# Altium PCB Test.PcbDoc (part 2 of 4)
Units mm, origin at the board's own origin, x right, y up, seen from the top; angles counter-clockwise.
Board outline 152.4 x 101.6 mm, 4 copper layers (Top Layer 1, Top Layer, Bottom Layer, Bottom Layer 1), stack 0.603 mm thick; 308 components, 154 nets, 859 pads, 6474 vias.
Unrouted connection lines stored in the file: 683.
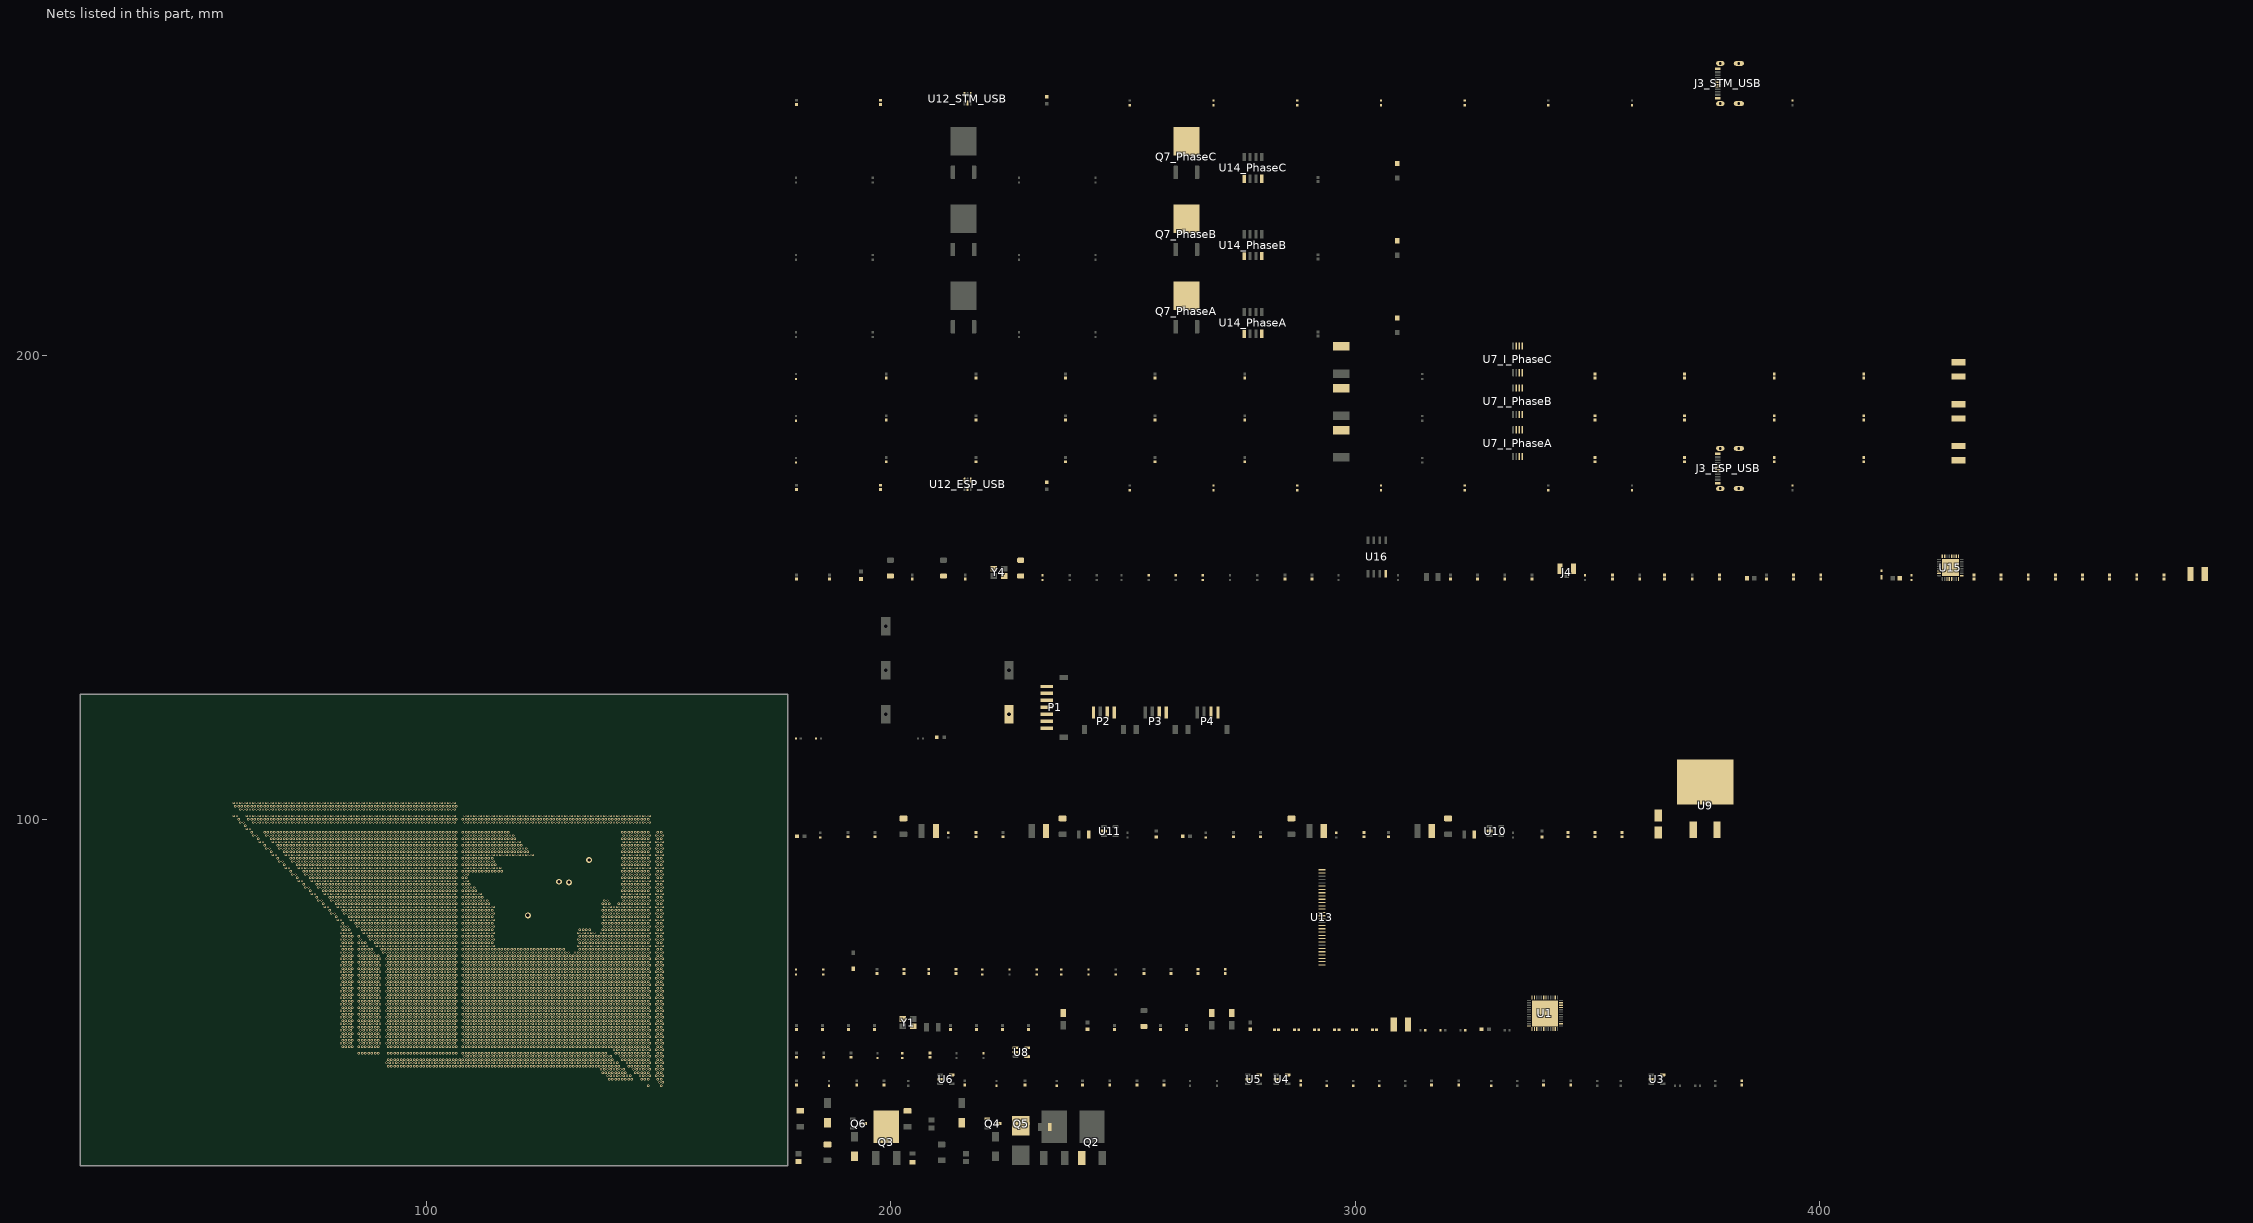
[diagram p4: the nets of this part, all layers, seen from the top]

## Part data
Ant1: library part CMP-240-000001-1, "Antenna Invert F 2.4Ghz", Component Type=Standard, Design Item ID=IFA-2.4Ghz, Pin Count=2, Source=IFA2.4GHZ.SchLib
C1 C2 C5 C6 C7 C10 C11 C12 C14 C15 C16 C51 C52 C57 C58 C65_ESP_USB C65_STM_USB C85 C87 C89 C98 C99: library part CMP-001-00354-3, "Capacitor 100nF 0402", Case Code (Metric)=1005, Case/Package=0402, Dielectric=X5R, Max Operating Temperature=85°C, Min Operating Temperature=-55°C, Package Quantity=1, Tolerance=20%, Voltage Rating=4V, Component Type=Standard, Construction=Flat, Design Item ID=CMP-1034-02139-2, Halogen Free="Halogen Free", Height=0.5mm, Length=0.039inch, Mount="Surface Mount", Packaging="Tape and Reel", Pins=2, RoHS Compliant=Yes, Series=M, Source=0402-10uF.SchLib, Termination=SMD/SMT, Thickness=0.028inch, Voltage Rating (DC)=4V, Width=0.02inch
C3 C68: library part CMP-001-00364-1, "Capacitor 4.7uF 0402", Case Code (Metric)=1005, Case/Package=0402, Dielectric=X5R, Max Operating Temperature=85°C, Min Operating Temperature=-55°C, Package Quantity=1, Tolerance=20%, Voltage Rating=4V, Component Type=Standard, Construction=Flat, Design Item ID=CMP-1034-02139-2, Halogen Free="Halogen Free", Height=0.5mm, Length=0.039inch, Mount="Surface Mount", Packaging="Tape and Reel", Pins=2, RoHS Compliant=Yes, Series=M, Source=0402-10uF.SchLib, Termination=SMD/SMT, Thickness=0.028inch, Voltage Rating (DC)=4V, Width=0.02inch
C4 C75: library part CMP-001-00375-1, "470 µF Molded Tantalum Polymer Capacitor 25 V 1411 (3528 Metric), 1210 150mOhm @ 100kHz", Case/Package="1210 AVX", Check_prices=https://www.snapeda.com/parts/TCJB106M025R0150/AVX/view-part/?ref=eda, Component Type=Standard, Design Item ID=TCJB106M025R0150, MF=AVX, MP=TCJB106M025R0150, Pins=2, SnapEDA_Link=https://www.snapeda.com/parts/TCJB106M025R0150/AVX/view-part/?ref=snap, Source=TCJB106M025R0150.SchLib
C8 C9 C13: library part CMP-001-00370-3, "Tantalum Capacitors - Polymer SMD 6.3V 47uF 1206 10% ESR=150mOhms", Case/Package="SMD-2 Kemet", Check_prices=https://www.snapeda.com/parts/T543A476K006ATW150/KEMET/view-part/?ref=eda, Component Type=Standard, Design Item ID=T543A476K006ATW150, MF=KEMET, MP=T543A476K006ATW150, Pins=2, SnapEDA_Link=https://www.snapeda.com/parts/T543A476K006ATW150/KEMET/view-part/?ref=snap, Source=T543A476K006ATW150.SchLib
C17 C18 C100 C101: library part CMP-001-00362-3, "Capacitor 6pF 0402", Case Code (Metric)=1005, Case/Package=0402, Dielectric=X5R, Max Operating Temperature=85°C, Min Operating Temperature=-55°C, Package Quantity=1, Tolerance=20%, Voltage Rating=4V, Component Type=Standard, Construction=Flat, Design Item ID=CMP-1034-02139-2, Halogen Free="Halogen Free", Height=0.5mm, Length=0.039inch, Mount="Surface Mount", Packaging="Tape and Reel", Pins=2, RoHS Compliant=Yes, Series=M, Source=0402-10uF.SchLib, Termination=SMD/SMT, Thickness=0.028inch, Voltage Rating (DC)=4V, Width=0.02inch
C19 C20 C96 C97: library part CMP-001-00374-1, "Capacitor 15pF 0402", Case Code (Metric)=1005, Case/Package=0402, Dielectric=X5R, Max Operating Temperature=85°C, Min Operating Temperature=-55°C, Package Quantity=1, Tolerance=20%, Voltage Rating=4V, Component Type=Standard, Construction=Flat, Design Item ID=CMP-1034-02139-2, Halogen Free="Halogen Free", Height=0.5mm, Length=0.039inch, Mount="Surface Mount", Packaging="Tape and Reel", Pins=2, RoHS Compliant=Yes, Series=M, Source=0402-10uF.SchLib, Termination=SMD/SMT, Thickness=0.028inch, Voltage Rating (DC)=4V, Width=0.02inch
C21 C23 C24 C25 C27 C29 C31 C37_I_PhaseA C37_I_PhaseB C37_I_PhaseC C103 C104 C105 C106: library part CMP-001-00357-4, "Capacitor 1nF 0402", Case Code (Metric)=1005, Case/Package=0402, Dielectric=X5R, Max Operating Temperature=85°C, Min Operating Temperature=-55°C, Package Quantity=1, Tolerance=20%, Voltage Rating=4V, Component Type=Standard, Construction=Flat, Design Item ID=CMP-1034-02139-2, Halogen Free="Halogen Free", Height=0.5mm, Length=0.039inch, Mount="Surface Mount", Packaging="Tape and Reel", Pins=2, RoHS Compliant=Yes, Series=M, Source=0402-10uF.SchLib, Termination=SMD/SMT, Thickness=0.028inch, Voltage Rating (DC)=4V, Width=0.02inch
C22 C26 C28 C30 C35_I_PhaseA C35_I_PhaseB C35_I_PhaseC C36_I_PhaseA C36_I_PhaseB C36_I_PhaseC C38_I_PhaseA C38_I_PhaseB C38_I_PhaseC C39_I_PhaseA C39_I_PhaseB C39_I_PhaseC C40_I_PhaseA C40_I_PhaseB C40_I_PhaseC C41_I_PhaseA C41_I_PhaseB C41_I_PhaseC C83 C92 C93: library part CMP-001-00355-4, "Capacitor 10nF 0402", Case Code (Metric)=1005, Case/Package=0402, Dielectric=X5R, Max Operating Temperature=85°C, Min Operating Temperature=-55°C, Package Quantity=1, Tolerance=20%, Voltage Rating=4V, Component Type=Standard, Construction=Flat, Design Item ID=CMP-1034-02139-2, Halogen Free="Halogen Free", Height=0.5mm, Length=0.039inch, Mount="Surface Mount", Packaging="Tape and Reel", Pins=2, RoHS Compliant=Yes, Series=M, Source=0402-10uF.SchLib, Termination=SMD/SMT, Thickness=0.028inch, Voltage Rating (DC)=4V, Width=0.02inch
C32_I_PhaseA C32_I_PhaseB C32_I_PhaseC C50 C53 C56 C59: library part CMP-001-00373-1, "100µF Molded Tantalum Polymer Capacitor 25 V 1411 (3528 Metric), 1210 150mOhm @ 100kHz", Case/Package="1210 AVX", Check_prices=https://www.snapeda.com/parts/TCJB106M025R0150/AVX/view-part/?ref=eda, Component Type=Standard, Design Item ID=TCJB106M025R0150, MF=AVX, MP=TCJB106M025R0150, Pins=2, SnapEDA_Link=https://www.snapeda.com/parts/TCJB106M025R0150/AVX/view-part/?ref=snap, Source=TCJB106M025R0150.SchLib
C33_I_PhaseA C33_I_PhaseB C33_I_PhaseC C34_I_PhaseA C34_I_PhaseB C34_I_PhaseC C42 C43 C44 C45 C48 C55 C61 C64_ESP_USB C64_STM_USB C79 C80 C81 C86 C102: library part CMP-001-00352-3, "Capacitor 10uF 0402s", Case Code (Metric)=1005, Case/Package=0402, Dielectric=X5R, Max Operating Temperature=85°C, Min Operating Temperature=-55°C, Package Quantity=1, Tolerance=20%, Voltage Rating=4V, Component Type=Standard, Construction=Flat, Design Item ID=CMP-1034-02139-2, Halogen Free="Halogen Free", Height=0.5mm, Length=0.039inch, Mount="Surface Mount", Packaging="Tape and Reel", Pins=2, RoHS Compliant=Yes, Series=M, Source=0402-10uF.SchLib, Termination=SMD/SMT, Thickness=0.028inch, Voltage Rating (DC)=4V, Width=0.02inch
C46: library part CMP-014-00008-1, "V-Chip, D4 x H5.8mm, 47uF, 6.3V", Capacitance=47µF, Capacitance Tolerance=+/-20%, Leakage Current=3uA, Manufacturer="Wurth Elektronik", Manufacturer Part Number=N/A, Operating Temperature Max=105°C, Operating Temperature Min=-55°C, Rated Voltage (DC)=6.3V, Ripple Current=86mA, Category="Aluminum Electrolytic Capacitors", Component Type=Standard, Design Item ID=865080140002, Diameter=4mm, Dissipation Factor=24%, Endurance=2000h, Height=5.5mm, Mount="Surface Mount", Packaging="Tape and Reel", Pins=2, Source=Al_Cap.SchLib, Supplier 1 Name=Mouser, Supplier 1 SN=710-865080140002, Supplier 1 URL=https://www.mouser.vn/ProductDetail/Wurth-Elektronik/865080140002?qs=0KOYDY2FL2%252BjKlezJ2boQA%3D%3D, Supplier 2 Name=Digi-Key, Supplier 2 SN=N/A, Supplier 2 URL=N/A, Supplier 3 Name=thegioiic, Supplier 3 SN=EEEHB0J330AR, Supplier 3 URL=https://www.thegioiic.com/tu-nhom-smd-47uf-6-3v-5x5-4mm
C47 C49 C54 C60 C66 C67 C70 C71 C72 C73 C76 C77 C78 C82 C84 C88 C94 C95: library part CMP-001-00353-3, "Capacitor 1uF 0402s", Case Code (Metric)=1005, Case/Package=0402, Dielectric=X5R, Max Operating Temperature=85°C, Min Operating Temperature=-55°C, Package Quantity=1, Tolerance=20%, Voltage Rating=4V, Component Type=Standard, Construction=Flat, Design Item ID=CMP-1034-02139-2, Halogen Free="Halogen Free", Height=0.5mm, Length=0.039inch, Mount="Surface Mount", Packaging="Tape and Reel", Pins=2, RoHS Compliant=Yes, Series=M, Source=0402-10uF.SchLib, Termination=SMD/SMT, Thickness=0.028inch, Voltage Rating (DC)=4V, Width=0.02inch
C62 C63: library part CMP-001-00259-1, "CAP, size 0805, 0.1 nF, 50 VDC", Manufacture Name=TDK, Manufacture SN=CGA4J2X8R1H104K125AD, Operating Temperature="-55 to +125degC", Tolerance=10%, Voltage Rating DC="50 VDC", Component Type=Standard, Design Item ID=0108051041050, Mounting Technology=SMT, Packaging="Tape and Reel", Pins=2, Size=0805, Source=Capacitor_0805_10_percent.SchLib, Supplier 1 Name=Mouser, Supplier 1 SN=810-C2012X8R1H104KEP, Supplier 1 URL=https://www.mouser.vn/ProductDetail/TDK/CGA4J2X8R1H104K125AD?qs=LcTL%2F5vFEzExqZqv3rh1qQ%3D%3D&utm_source=mouser-refine-download&utm_medium=file&utm_campaign=CGA4J2X8R1H104K125AD&utm_content=TDK, Supplier 2 Name=Digi-Key, Supplier 2 SN=445-8810-2-ND, Supplier 2 URL=https://www.digikey.com/en/products/detail/tdk-corporation/cga4j2x8r1h104k125ad/3248169, Supplier 3 Name=thegioiic, Supplier 3 SN=OEM, Supplier 3 URL=N/A
C69: library part CMP-001-00356-1, "Capacitor 2.2uF 0402", Case Code (Metric)=1005, Case/Package=0402, Dielectric=X5R, Max Operating Temperature=85°C, Min Operating Temperature=-55°C, Package Quantity=1, Tolerance=20%, Voltage Rating=4V, Component Type=Standard, Construction=Flat, Design Item ID=CMP-1034-02139-2, Halogen Free="Halogen Free", Height=0.5mm, Length=0.039inch, Mount="Surface Mount", Packaging="Tape and Reel", Pins=2, RoHS Compliant=Yes, Series=M, Source=0402-10uF.SchLib, Termination=SMD/SMT, Thickness=0.028inch, Voltage Rating (DC)=4V, Width=0.02inch
C74_PhaseA C74_PhaseB C74_PhaseC: library part CMP-001-00366-1, "Capacitor 22uF 0402", Case Code (Metric)=1005, Case/Package=0402, Dielectric=X5R, Max Operating Temperature=85°C, Min Operating Temperature=-55°C, Package Quantity=1, Tolerance=20%, Voltage Rating=4V, Component Type=Standard, Construction=Flat, Design Item ID=CMP-1034-02139-2, Halogen Free="Halogen Free", Height=0.5mm, Length=0.039inch, Mount="Surface Mount", Packaging="Tape and Reel", Pins=2, RoHS Compliant=Yes, Series=M, Source=0402-10uF.SchLib, Termination=SMD/SMT, Thickness=0.028inch, Voltage Rating (DC)=4V, Width=0.02inch
C90 C91: library part CMP-001-00361-3, "Capacitor 1pF 0402", Case Code (Metric)=1005, Case/Package=0402, Dielectric=X5R, Max Operating Temperature=85°C, Min Operating Temperature=-55°C, Package Quantity=1, Tolerance=20%, Voltage Rating=4V, Component Type=Standard, Construction=Flat, Design Item ID=CMP-1034-02139-2, Halogen Free="Halogen Free", Height=0.5mm, Length=0.039inch, Mount="Surface Mount", Packaging="Tape and Reel", Pins=2, RoHS Compliant=Yes, Series=M, Source=0402-10uF.SchLib, Termination=SMD/SMT, Thickness=0.028inch, Voltage Rating (DC)=4V, Width=0.02inch
D1 D2 D19: library part CMP-004-00095-1, "WL-SMCW SMT Mono-color Chip LED Blur, size 0603, White", Color=White, Component Type=Standard, ComponentLink1Description="Datasheet link", ComponentLink1URL=N/A, ComponentLink2Description="Supplier 1 URL", ComponentLink2URL=https://www.mouser.vn/ProductDetail/ROHM-Semiconductor/SMLEN3WBC8W1?qs=W0yvOO0ixfGun78rr9Unsw%3D%3D, ComponentLink3Description="Supplier 2 URL", ComponentLink3URL=https://www.digikey.com/en/products/detail/qt-brightek-qtb/QBLP601-IW/4814655, ComponentLink4Description="Supplier 3 URL", ComponentLink4URL=N/A, Design Item ID=160603WhiteBlur, Pins=2, Size=0603, Source=WL-SMCW_0603.SchLib, Supplier 1 Name=Mouser, Supplier 1 SN=755-SMLEN3WBC8W1, Supplier 1 URL=https://www.mouser.vn/ProductDetail/ROHM-Semiconductor/SMLEN3WBC8W1?qs=W0yvOO0ixfGun78rr9Unsw%3D%3D, Supplier 2 Name=Digi-Key, Supplier 2 SN=1516-1057-2-ND, Supplier 2 URL=https://www.digikey.com/en/products/detail/qt-brightek-qtb/QBLP601-IW/4814655, Supplier 3 Name=ICDayRoi, Supplier 3 SN=N/A, Supplier 3 URL=N/A, Type=Blur
D3 D6: library part CMP-004-00117-3, Component Type=Standard, Datasheet=https://diotec.com/de/produktliste/SBD.html, Design Item ID=Zener, ki_description=Zener, ki_keywords=Zener, Pins=2, Reference=D, Source=schottky-diode.SchLib
D4 D7: library part CMP-004-00123-1, "ZenerDiode 3.6V", Component Type=Standard, Datasheet=https://diotec.com/de/produktliste/SBD.html, Design Item ID=Zener, ki_description=Zener, ki_keywords=Zener, Pins=2, Reference=D, Source=schottky-diode.SchLib
D5 D8: library part CMP-004-00093-1, "WL-SMCW SMT Mono-color Chip LED Blur, size 0603, Red, 2V, 140deg", Color=Red, Component Type=Standard, ComponentLink1Description="Datasheet link", ComponentLink1URL=N/A, ComponentLink2Description="Supplier 1 URL", ComponentLink2URL=https://www.mouser.vn/ProductDetail/ROHM-Semiconductor/CSL1901VW1?qs=vvQtp7zwQdNmrXZcE27xEA%3D%3D, ComponentLink3Description="Supplier 2 URL", ComponentLink3URL=https://www.digikey.com/en/products/detail/rohm-semiconductor/SML-D12U8WT86/1641799, ComponentLink4Description="Supplier 3 URL", ComponentLink4URL=N/A, Design Item ID=160603RedBlur, Pins=2, Size=0603, Source=WL-SMCW_0603.SchLib, Supplier 1 Name=Mouser, Supplier 1 SN=755-CSL1901VW1, Supplier 1 URL=https://www.mouser.vn/ProductDetail/ROHM-Semiconductor/CSL1901VW1?qs=vvQtp7zwQdNmrXZcE27xEA%3D%3D, Supplier 2 Name=Digi-Key, Supplier 2 SN=511-1580-2-ND, Supplier 2 URL=https://www.digikey.com/en/products/detail/rohm-semiconductor/SML-D12U8WT86/1641799, Supplier 3 Name=ICDayRoi, Supplier 3 SN=N/A, Supplier 3 URL=N/A, Type=Blur
D9 D11 D13 D15: library part CMP-004-00085-1, "400W, 21.1V, 5%, Unidirectional, TVS", Case/Package="SMA-2 Taiwan Semiconductor", Check_prices=https://www.snapeda.com/parts/SMAJ18A/taiwan/view-part/?ref=eda, Component Type=Standard, Design Item ID=SMAJ18A, MF="Taiwan Semiconductor", MP=SMAJ18A, Pins=2, SnapEDA_Link=https://www.snapeda.com/parts/SMAJ18A/taiwan/view-part/?ref=snap, Source=SMAJ18A.SchLib
D10 D12 D14 D16: library part CMP-004-00086-2, Component Type=Standard, Datasheet=https://diotec.com/de/produktliste/SBD.html, Design Item ID=Schottky-Diode, ki_description="Schottky Diode", ki_keywords=Schottky, Pins=2, Reference=D, Source=schottky-diode.SchLib
D17: library part CMP-004-00119-1, Package=None, Availability=Unavailable, Component Type=Standard, Design Item ID=1N4148W, MP=1N4148W, Pins=2, Price=None, Source=1N4148W.SchLib
D18_PhaseA D18_PhaseB D18_PhaseC: library part CMP-004-00113-1, Component Type=Standard, Design Item ID=1N5819W, Pins=2, Source=1N5819W.SchLib
F1 F2: library part CMP-005-00046-1, "Resettable Fuse, Size 0805, 6V, 0.5A", Hold Current=0.5A, Manufacturer=Littelfuse, Threshold Current=100A, Threshold Voltage=6V, Trip Current=1A, Component Type=Standard, ComponentLink1Description="Datasheet link", ComponentLink1URL=https://www.littelfuse.com/~/media/electronics/datasheets/resettable_ptcs/littelfuse_ptc_0805l_datasheet.pdf.pdf, ComponentLink2Description="Supplier 1 URL", ComponentLink2URL=https://www.mouser.vn/ProductDetail/Littelfuse/0805L050WR?qs=SJZ%252BTX%252BI2BS1ufZ22HRodg%3D%3D, ComponentLink3Description="Supplier 2 URL", ComponentLink3URL=https://www.digikey.com/en/products/detail/littelfuse-inc/0805L050WR/1212822?s=N4IgTCBcDaIAwA44FYAyK4HUBKACEAugL5A, ComponentLink4Description="Supplier 3 URL", ComponentLink4URL=https://www.thegioiic.com/0805l050wr-cau-chi-tu-phuc-hoi-0805-6v-500ma, Design Item ID=060805050006, Mounting Technology=SMT/SMD, Pins=2, Size=0805, Source=Fuse_SMD.SchLib, Supplier 1 Name=Mouser, Supplier 1 SN=576-0805L050, Supplier 1 URL=https://www.mouser.vn/ProductDetail/Littelfuse/0805L050WR?qs=SJZ%252BTX%252BI2BS1ufZ22HRodg%3D%3D, Supplier 2 Name=Digi-Key, Supplier 2 SN=F2772TR-ND, Supplier 2 URL=https://www.mouser.vn/ProductDetail/Littelfuse/0805L050WR?qs=SJZ%252BTX%252BI2BS1ufZ22HRodg%3D%3D, Supplier 3 Name=thegioiic, Supplier 3 SN=0805L050WR, Supplier 3 URL=https://www.thegioiic.com/0805l050wr-cau-chi-tu-phuc-hoi-0805-6v-500ma
F3: library part CMP-005-00062-2, "Fuse 1808 with case", Case/Package="SMD-2 Littelfuse", Availability="In Stock", Check_prices=https://www.snapeda.com/parts/0154007.DR/Littelfuse+Inc./view-part/?ref=eda, Component Type=Standard, Design Item ID=0154007.DR, MF="Littelfuse Inc.", MP=0154007.DR, Pins=2, Price=None, Purchase-URL=https://pricing.snapeda.com/search?q=0154007.DR&ref=eda, SnapEDA_Link=https://www.snapeda.com/parts/0154007.DR/Littelfuse+Inc./view-part/?ref=snap, Source=0154007.DR.SchLib
F4: library part CMP-005-00047-1, "Resettable Fuse, Size 0805, 6V, 1A", Hold Current=1A, Manufacturer=Littelfuse, Threshold Current=40A, Threshold Voltage=6V, Trip Current=1.95A, Component Type=Standard, ComponentLink1Description="Datasheet link", ComponentLink1URL=https://www.littelfuse.com/~/media/electronics/datasheets/resettable_ptcs/littelfuse_ptc_0805l_datasheet.pdf.pdf, ComponentLink2Description="Supplier 1 URL", ComponentLink2URL=https://www.mouser.vn/ProductDetail/Littelfuse/0805L100WR?qs=SJZ%252BTX%252BI2BTMlREVsW49pQ%3D%3D, ComponentLink3Description="Supplier 2 URL", ComponentLink3URL=https://www.digikey.com/en/products/detail/littelfuse-inc/0805L100WR/1212824, ComponentLink4Description="Supplier 3 URL", ComponentLink4URL=https://www.thegioiic.com/0805l100wr-cau-chi-tu-phuc-hoi-0805-6v-1a, Design Item ID=060805100006, Mounting Technology=SMT/SMD, Pins=2, Size=0805, Source=Fuse_SMD.SchLib, Supplier 1 Name=Mouser, Supplier 1 SN=576-0805L100, Supplier 1 URL=https://www.mouser.vn/ProductDetail/Littelfuse/0805L100WR?qs=SJZ%252BTX%252BI2BTMlREVsW49pQ%3D%3D, Supplier 2 Name=Digi-Key, Supplier 2 SN=F2774TR-ND, Supplier 2 URL=https://www.mouser.vn/ProductDetail/Littelfuse/0805L100WR?qs=SJZ%252BTX%252BI2BTMlREVsW49pQ%3D%3D, Supplier 3 Name=thegioiic, Supplier 3 SN=0805L100WR, Supplier 3 URL=https://www.thegioiic.com/0805l100wr-cau-chi-tu-phuc-hoi-0805-6v-1a
FB1 FB2: library part CMP-006-00090-1, "Ferrite, 0603, 600 Ohms, 300 mA", Manufacture Name="Wurth Elektronik", Manufacture SN=742792651, Maximum DC Current="1 A", Maximum DC Resistance="200 mOhms", Operating Temperature="-55 to +125degC", Test Frequency=100MHz, Tolerance=25%, Component Type=Standard, Design Item ID=03060360110225, Impedance="600 Ohms", Mounting Technology=SMT, Packaging="Tape and Reel", Pins=2, Size=0603, Source=Ferrite_Bead_0603.SchLib, Supplier 1 Name=Mouser, Supplier 1 SN=710-742792651, Supplier 1 URL=https://www.mouser.com/ProductDetail/Wurth-Elektronik/742792651?qs=sGAEpiMZZMt1hubY80%2Fs8M60rIzA20dgTaAssd1%2FEf4%3D&utm_source=mouser-refine-download&utm_medium=file&utm_campaign=742792651&utm_content=Wurth-Elektronik, Supplier 2 Name=Digi-Key, Supplier 2 SN=N/A, Supplier 2 URL=N/A, Supplier 3 Name=thegioiic, Supplier 3 SN=N/A, Supplier 3 URL=N/A
FB3 FB4: library part CMP-006-00234-2, "Ferrite Chip, 1 Function(s), 2A, 2 Pin(s)", Current Rating=2A, DC Resistance-Max=50mR, Max Operating Temperature=125°C, Min Operating Temperature=-55°C, Height=0.8mm, Length=1.6mm, Material=Ferrite, Packaging="Tape and Reel", RoHS Compliant=Yes, Width=0.8mm
FB5_ESP_USB FB5_STM_USB: library part CMP-006-00090-1, "Ferrite, 0603, 600 Ohms, 1 A", Manufacture Name="Wurth Elektronik", Manufacture SN=742792651, Maximum DC Current="1 A", Maximum DC Resistance="200 mOhms", Operating Temperature="-55 to +125degC", Test Frequency=100MHz, Tolerance=25%, Component Type=Standard, Design Item ID=03060360110225, Impedance="600 Ohms", Mounting Technology=SMT, Packaging="Tape and Reel", Pins=2, Size=0603, Source=Ferrite_Bead_0603.SchLib, Supplier 1 Name=Mouser, Supplier 1 SN=710-742792651, Supplier 1 URL=https://www.mouser.com/ProductDetail/Wurth-Elektronik/742792651?qs=sGAEpiMZZMt1hubY80%2Fs8M60rIzA20dgTaAssd1%2FEf4%3D&utm_source=mouser-refine-download&utm_medium=file&utm_campaign=742792651&utm_content=Wurth-Elektronik, Supplier 2 Name=Digi-Key, Supplier 2 SN=N/A, Supplier 2 URL=N/A, Supplier 3 Name=thegioiic, Supplier 3 SN=N/A, Supplier 3 URL=N/A
J1: library part CMP-118-000008-1, "High Power Terminal , 25A , 300V", Component Type=Standard, Design Item ID=HB9500-2, Pin Count=2, Source=HB9500-2.SchLib
J2: library part CMP-118-000006-1, "High Power Terminal , 25A , 300V", Component Type=Standard, Design Item ID=HB9500-3, Pin Count=3, Source=HB9500-3.SchLib
J3_ESP_USB J3_STM_USB: library part CMP-002-01572-3, "USB Type C - Connector, Top-mount SMT, 16pos", Case/Package=None, Check_prices=https://www.snapeda.com/parts/217179-0001/Molex/view-part/?ref=eda, Component Type=Standard, Design Item ID=2171790001, MF=Molex, MP=217179-0001, Pins=16, SnapEDA_Link=https://www.snapeda.com/parts/217179-0001/Molex/view-part/?ref=snap, Source=2171790001.SchLib
J4: library part CMP-002-01573-1, "1 POS Vertical SMD Small form factor with big performance through 6 GHz connector,MHF, RF, micro-coaxial MHF I Receptacle", Case/Package=None, Check_prices=https://www.snapeda.com/parts/20279-001E-03/I-PEX/view-part/?ref=eda, Component Type=Standard, Design Item ID=20279-001E-03, MF=I-PEX, MP=20279-001E-03, Pins=3, SnapEDA_Link=https://www.snapeda.com/parts/20279-001E-03/I-PEX/view-part/?ref=snap, Source=20279-001E-03.SchLib
L1 L2: library part CMP-006-00351-2, Case/Package=None, Availability=Unavailable, Component Type=Standard, ComponentLink1Description="Datasheet Link", ComponentLink2Description="Website Link", Design Item ID=DFE18SBN1R0ME0L, MP=DFE18SBN1R0ME0L, Pins=2, Price=None, Source=DFE18SBN1R0ME0L.SchLib
P1: library part CMP-002-01153-1, "WR-WTB SMT Male Horizontal Shrouded Header, pitch 1.5mm, 7p", Contact Resistance=20mOhm, Operating Temperature="-25 to +85degC", Rated Current=1A, Withstanding Voltage=500VAC, Working Voltage=50VAC, Component Type=Standard, ComponentLink1Description=Manufacturer, ComponentLink1URL=http://www.we-online.de, ComponentLink2Description=Datasheet, ComponentLink2URL=https://www.we-online.com/catalog/datasheet/648107131822.pdf, ComponentLink3Description="Global Supply", ComponentLink3URL=https://www.we-online.com/en/components/products/WTB_1_50_SMT_MALE_HORIZONTAL_SHROUDED_HEADER_6481XX131822?sq=648107131822#648107131822, Design Item ID=648107131822, Gender=Male, Mounting Technology=SMT, Packaging="Tape and Reel", Part Number=648107131822, Pin Number=7, Pins=7, Pitch=1.5mm, Published Date="January 2020", Publisher="Wurth Elektronik", Source=WR-WTB_1.50mm.SchLib, Supplier 1 Name=Mouser, Supplier 1 SN=N/A, Supplier 1 URL=N/A, Supplier 2 Name=Digi-Key, Supplier 2 SN=N/A, Supplier 2 URL=N/A, Supplier 3 Name=thegioiic, Supplier 3 SN=N/A, Supplier 3 URL=N/A, Type=Horizontal
P2 P3 P4: library part CMP-002-01150-1, "WR-WTB SMT Male Horizontal Shrouded Header, pitch 1.5mm, 4p", Contact Resistance=20mOhm, Operating Temperature="-25 to +85degC", Rated Current=1A, Withstanding Voltage=500VAC, Working Voltage=50VAC, Component Type=Standard, ComponentLink1Description=Manufacturer, ComponentLink1URL=http://www.we-online.de, ComponentLink2Description=Datasheet, ComponentLink2URL=https://www.we-online.com/catalog/datasheet/648104131822.pdf, ComponentLink3Description="Global Supply", ComponentLink3URL=https://www.we-online.com/en/components/products/WTB_1_50_SMT_MALE_HORIZONTAL_SHROUDED_HEADER_6481XX131822?sq=648104131822#648104131822, ComponentLink4Description="Global Supply", ComponentLink4URL=https://www.mouser.vn/ProductDetail/Wurth-Elektronik/648104131822?qs=ZtY9WdtwX57XPjIMVYKZ6w%3D%3D, Design Item ID=648104131822, Gender=Male, Mounting Technology=SMT, Packaging="Tape and Reel", Part Number=648104131822, Pin Number=4, Pins=4, Pitch=1.5mm, Published Date="January 2020", Publisher="Wurth Elektronik", Source=WR-WTB_1.50mm.SchLib, Supplier 1 Name=Mouser, Supplier 1 SN=710-648104131822, Supplier 1 URL=https://www.mouser.vn/ProductDetail/Wurth-Elektronik/648104131822?qs=ZtY9WdtwX57XPjIMVYKZ6w%3D%3D, Supplier 2 Name=Digi-Key, Supplier 2 SN=N/A, Supplier 2 URL=N/A, Supplier 3 Name=thegioiic, Supplier 3 SN=N/A, Supplier 3 URL=N/A, Type=Horizontal
Q1 Q2 Q3: library part CMP-123-000001-2, "P-Channel 40V 40A (Tc) 2.5W (Ta), 62.5W (Tc) Surface Mount TO-252, (D-Pak)", Package="TO-252 Alpha &amp; Omega Semiconductor", Check_prices=https://www.snapeda.com/parts/AOD4185/Alpha/view-part/?ref=eda, Component Type=Standard, Design Item ID=AOD4185, MF="Alpha &", MP=AOD4185, Pin Count=3, SnapEDA_Link=https://www.snapeda.com/parts/AOD4185/Alpha/view-part/?ref=snap, Source=AOD4185.SchLib
Q4 Q5 Q6: library part CMP-123-000000-1, "P-Channel 30 V 4.3A (Ta) 1.4W (Ta) Surface Mount SOT-23-3", Package="SOT-23 Alpha &amp; Omega Semiconductor", Check_prices=https://www.snapeda.com/parts/AO3407A/Alpha/view-part/?ref=eda, Component Type=Standard, Design Item ID=AO3407A, MF="Alpha &", MP=AO3407A, Pin Count=3, SnapEDA_Link=https://www.snapeda.com/parts/AO3407A/Alpha/view-part/?ref=snap, Source=AO3407A.SchLib
Q7_PhaseA Q7_PhaseB Q7_PhaseC Q8_PhaseA Q8_PhaseB Q8_PhaseC: library part CMP-123-000003-1, "RoHS Compliant", Package="TO-252-3 Infineon", Availability="In Stock", Check_prices=https://www.snapeda.com/parts/IRLR7843TRPBF/Infineon+Technologies/view-part/?ref=eda, Component Type=Standard, Design Item ID=IRLR7843TRPBF, MF="Infineon Technologies", MP=IRLR7843TRPBF, Pin Count=3, Price=None, Purchase-URL=https://pricing.snapeda.com/search/part/IRLR7843TRPBF/?ref=eda, SnapEDA_Link=https://www.snapeda.com/parts/IRLR7843TRPBF/Infineon+Technologies/view-part/?ref=snap, Source=IRLR7843TRPBF.SchLib
R1 R4 R33 R36 R61 R69 R72 R73: library part CMP-009-00688-1, "RES 0402 3.3K"
R2 R3 R5 R32 R35 R62 R63 R64 R65 R66 R70 R71: library part CMP-009-00678-4, "0402Resistor 0 Ohm"
R6 R7 R14 R16 R17 R18 R21 R22 R24 R27_I_PhaseA R27_I_PhaseB R27_I_PhaseC R28 R30 R41_ESP_USB R41_STM_USB R42_ESP_USB R42_STM_USB R43_ESP_USB R43_STM_USB R46_ESP_USB R46_STM_USB R47_ESP_USB R47_STM_USB R48_ESP_USB R48_STM_USB R50 R51 R52 R54 R55 R56 R58_PhaseA R58_PhaseB R58_PhaseC R60_PhaseA R60_PhaseB R60_PhaseC R67 R68: library part CMP-009-00675-4, "RES 0402 10K"
R8 R9 R10 R11 R13 R15: library part CMP-009-00680-1, "RES 0402 47K"
R12 R19 R20 R23: library part CMP-009-00691-1, "0402Resistor 680Ohm"
R25_I_PhaseA R25_I_PhaseB R25_I_PhaseC: library part CMP-009-00698-1, "0402Resistor 1Ohm"
R26_I_PhaseA R26_I_PhaseB R26_I_PhaseC: library part CMP-009-00697-1, "RES 0.01 OHM 1% 3W 2512", Case Code (Metric)=6432, Case/Package=2512, Max Operating Temperature=170°C, Min Operating Temperature=-65°C, Package Quantity=2000, Power Rating=3W, Resistance Tolerance=1%, Resistor Type="Metal Strip", Temperature Coefficient=75ppm/°C, Component Type=Standard, Design Item ID=CMP-02407-010954-1, Height=0.635mm, Lead Free="Lead Free", Length=6.4mm, Packaging="Tape and Reel", Pins=2, RoHS Compliant=Yes, Series=WSLP, Source=2512.SchLib, Termination=SMD/SMT, Tolerance=1%, Weight=0.001429oz, Width=3.2mm
R29 R44_ESP_USB R44_STM_USB R45_ESP_USB R45_STM_USB: library part CMP-009-00695-1, "0402Resistor 22Ohm"
R31: library part CMP-009-00674-3, "0402Resistor 1K Ohm"
R34 R37: library part CMP-009-00683-1, "RES 0402 100K"
R38 R39 R40: library part CMP-009-00482-1, "RES, size 0805, 10 KOhm, 1/8 W", Manufacture  Name="Vishay Dale", Manufacture  SN=CRCW080515K0FKEAC, Rated Power="1/8 W", Resistance Tolerance=+/-1%, Component Type=Standard, ComponentLink1Description="Datasheet link", ComponentLink1URL=https://www.vishay.com/docs/28773/crcwce3.pdf, ComponentLink2Description="Supplier 1 URL", ComponentLink2URL=https://www.mouser.vn/ProductDetail/Vishay-Dale/CRCW080515K0FKEA?qs=bMjB6bAaLEM4rXT2DoR3BA%3D%3D, ComponentLink3Description="Supplier 2 URL", ComponentLink3URL=https://www.digikey.com/en/products/detail/vishay-dale/CRCW080515K0FKEAC/7928558, ComponentLink4Description="Supplier 3 URL", ComponentLink4URL=N/A, Design Item ID=0008051531, Mounting Technology=SMT, Pins=2, Size=0805, Source=Resistor_0805.SchLib, Supplier 1 Name=Mouser, Supplier 1 SN=71-CRCW0805-15K-E3, Supplier 1 URL=https://www.mouser.vn/ProductDetail/Vishay-Dale/CRCW080515K0FKEA?qs=bMjB6bAaLEM4rXT2DoR3BA%3D%3D, Supplier 2 Name=Digi-Key, Supplier 2 SN=541-4136-2-ND, Supplier 2 URL=https://www.digikey.com/en/products/detail/vishay-dale/CRCW080515K0FKEAC/7928558, Supplier 3 Name=Thegioiic, Supplier 3 SN=N/A, Supplier 3 URL=N/A
R49: library part CMP-009-00676-1, "RES 0402 470K"
R53: library part CMP-009-00687-2, "RES 0402 4.7K"
R57_PhaseA R57_PhaseB R57_PhaseC R59_PhaseA R59_PhaseB R59_PhaseC: library part CMP-009-00677-3, "0402Resistor 100Ohm"
U1: library part CMP-031-00017-3, "ARMÂ® CortexÂ®-M4F STM32G4 Microcontroller IC 32-Bit Single-Core 170MHz 128KB (128K x 8) FLASH 48-UFQFPN (7x7)", Case/Package="UFQFPN-48 STMicroelectronics", Check_prices=https://www.snapeda.com/parts/STM32G431CBU6/STMicroelectronics/view-part/?ref=eda, Component Type=Standard, Design Item ID=STM32G431CBU6, MF=STMicroelectronics, MP=STM32G431CBU6, Pins=49, SnapEDA_Link=https://www.snapeda.com/parts/STM32G431CBU6/STMicroelectronics/view-part/?ref=snap, Source=STM32G431CBU6.SchLib
U2 U17 U18 U19: library part CMP-011-00123-3, "Switch Tactile N.O. SPST Round Button Gull Wing 0.05A 12VDC 1.5N SMD T/R", Case/Package=None, Check_prices=https://www.snapeda.com/parts/B3U1000P/Omron/view-part/?ref=eda, Component Type=Standard, Design Item ID=B3U-1000P, MF=Omron, MP=B3U1000P, Pins=2, SnapEDA_Link=https://www.snapeda.com/parts/B3U1000P/Omron/view-part/?ref=snap, Source=B3U-1000P.SchLib
U3 U4 U5 U6: library part CMP-014-00080-6, "General Purpose Amplifier 1 Circuit Rail-to-Rail SOT-23-5", Case/Package="SOT-23 Microchip", Availability=Unavailable, Component Type=Standard, Design Item ID=MCP601T-I/OT, MF=Microchip, MP=MCP601T-I/OT, Pins=5, Price=None, SnapEDA_Link=https://www.snapeda.com/parts/MCP601T-I/OT/Microchip/view-part/43729/?ref=snap, Source=SnapEDAsch.SchLib
U7_I_PhaseA U7_I_PhaseB U7_I_PhaseC: library part CMP-014-00085-3, "-4 to 80V, bidirectional, ultra-precise current sense amplifier with enhanced PWM rejection", Case/Package="TSSOP-8 Texas Instruments", Check_prices=https://www.snapeda.com/parts/INA240A1PW/Texas+Instruments/view-part/?ref=eda, Component Type=Standard, Design Item ID=INA240A1PW, MF="Texas Instruments", MP=INA240A1PW, Pins=8, SnapEDA_Link=https://www.snapeda.com/parts/INA240A1PW/Texas+Instruments/view-part/?ref=snap, Source=INA240A1PW.SchLib
U8: library part CMP-014-00080-5, "General Purpose Amplifier 1 Circuit Rail-to-Rail SOT-23-5", Case/Package="SOT-23 Microchip", Availability=Unavailable, Component Type=Standard, Design Item ID=MCP601T-I/OT, MF=Microchip, MP=MCP601T-I/OT, Pins=5, Price=None, SnapEDA_Link=https://www.snapeda.com/parts/MCP601T-I/OT/Microchip/view-part/43729/?ref=snap, Source=SnapEDAsch.SchLib
U9: library part CMP-098-000007-1, "Out: 5V, 1.5A; In: 7V to 35V; Pacakge: TO-263", Output Current=1.5A, Package=TO-263, Voltage Input Maximum="7V to 35V", Voltage Output=5V, Component Type=Standard, ComponentLink1Description="Datasheet link", ComponentLink1URL=https://www.st.com/resource/en/datasheet/l78.pdf, ComponentLink2Description="Supplier 1 URL", ComponentLink2URL=https://www.mouser.com/ProductDetail/STMicroelectronics/L7805ACD2T-TR?qs=Ctxo64yJVFuOLXlPPZdJUQ%3D%3D, ComponentLink3Description="Supplier 2 URL", ComponentLink3URL=https://www.digikey.com/en/products/detail/stmicroelectronics/L7805ACD2T-TR/1038230, ComponentLink4Description="Supplier 3 URL", ComponentLink4URL=https://www.thegioiic.com/l7805acd2t-ic-on-ap-5v-1-5a, Design Item ID=L7805ACD2T_TO-263, Pin Count=3, Source=78xx.SchLib, Supplier 1 Name=Mouser, Supplier 1 SN=511-L7805ACD2T-TR, Supplier 1 URL=https://www.mouser.com/ProductDetail/STMicroelectronics/L7805ACD2T-TR?qs=Ctxo64yJVFuOLXlPPZdJUQ%3D%3D, Supplier 2 Name=Digi-Key, Supplier 2 SN=497-7253-2-ND, Supplier 2 URL=https://www.digikey.com/en/products/detail/stmicroelectronics/L7805ACD2T-TR/1038230, Supplier 3 Name=thegioiic, Supplier 3 SN=N/A, Supplier 3 URL=https://www.thegioiic.com/l7805acd2t-ic-on-ap-5v-1-5a
U10 U11: library part CMP-149-000001-2, "Linear Voltage Regulator IC Positive Fixed 1 Output 500mA TSOT-23-5", Package="SOT-23-5 Richtek", Check_prices=https://www.snapeda.com/parts/RT9013-33GB/Richtek/view-part/?ref=eda, Component Type=Standard, Design Item ID=RT9013-33GB, MF="Richtek USA", MP=RT9013-33GB, Pin Count=4, SnapEDA_Link=https://www.snapeda.com/parts/RT9013-33GB/Richtek/view-part/?ref=snap, Source=RT9013-33GB.SchLib
U12_ESP_USB U12_STM_USB: library part CMP-004-00115-2, "12.5V Clamp 8A (8/20Âµs) Ipp Tvs Diode Surface Mount SC-88/SC70-6/SOT-363", Case/Package="SC-88-6 ON Semiconductor", Check_prices=https://www.snapeda.com/parts/SMF05CT1G/Onsemi/view-part/?ref=eda, Component Type=Standard, Design Item ID=SMF05CT1G, MF="ON Semiconductor", MP=SMF05CT1G, Pins=6, SnapEDA_Link=https://www.snapeda.com/parts/SMF05CT1G/Onsemi/view-part/?ref=snap, Source=SMF05CT1G.SchLib
U13: library part CMP-00001-1, "SSD1306_China , 0.96 inch display"
U14_PhaseA U14_PhaseB U14_PhaseC: library part CMP-031-00014-2, "Half-Bridge Gate Driver IC Non-Inverting 8-SOIC", Case/Package="SOIC-8 Infineon", Check_prices=https://www.snapeda.com/parts/IR2104SPBF/Infineon/view-part/?ref=eda, Component Type=Standard, Design Item ID=IR2104SPBF, MF=Infineon, MP=IR2104SPBF, Pins=8, SnapEDA_Link=https://www.snapeda.com/parts/IR2104SPBF/Infineon/view-part/?ref=snap, Source=IR2104SPBF.SchLib
U15: library part CMP-031-00018-2, Case/Package=None, Availability=Unavailable, Component Type=Standard, Design Item ID=ESP32-C3FH4, MP=ESP32-C3FH4, Pins=33, Price=None, Source=ESP32-C3FH4.SchLib
U16: library part CMP-031-00021-3, "FLASH - NOR Memory IC 128Mb (16M x 8) SPI - Quad I/O, QPI, DTR 133 MHz 8-SOIC", Case/Package="SOIC-8 Winbond Electronics", Check_prices=https://www.snapeda.com/parts/W25Q128JVSIQ/Winbond/view-part/?ref=eda, Component Type=Standard, Design Item ID=W25Q128JVSIQ, MF="Winbond Electronics", MP=W25Q128JVSIQ, Pins=8, SnapEDA_Link=https://www.snapeda.com/parts/W25Q128JVSIQ/Winbond/view-part/?ref=snap, Source=W25Q128JVSIQ.SchLib
Y1: library part CMP-003-00059-1, "CRYSTAL 8MHZ 8PF SMD", Case/Package=NX3225SA, Frequency=8MHz, Load Capacitance=8pF, Manufacturer=NDK, Manufacturer Part Number=NX3225SA-25.000M-STD-CRS-2, Temperature="-40°C to +125°C", Temperature Range High=125°C, Temperature Range Low=-40°C, Tolerance=15ppm, Automotive=Yes, Automotive Grade="Grade 1", Category=Crys, Component Type=Standard, Design Item ID=CMP-200220-000002-1, Device Class L1="Passive Components", Device Class L2="Crystals / Oscillators", Device Class L3=Crystals, Digikey Description="CRYSTAL 40MHZ 8PF SMD", Esr=100, Height=0.6mm, Lead Free=Yes, Octopart=https://octopart.com/nx3225sa-25.000m-std-crs-2-ndk-51374293, Pins=4, RoHS=TRUE, Series=NX3225SA, Source="Components - 28.03.25 - 23.15.SchLib"
Y2 Y3: library part CMP-003-00053-1, "Parallel - Fundamental Quartz Crystal, 0.032768MHz Nom", Frequency Stability=0.0144%, Frequency Tolerance=20ppm, Load Capacitance=12.5pF, Max Operating Temperature=85°C, Min Operating Temperature=-40°C
Y4: library part CMP-003-00058-1, "CRYSTAL 40MHZ 8PF SMD", Case/Package=NX3225SA, Frequency=40MHz, Load Capacitance=8pF, Manufacturer=NDK, Manufacturer Part Number=NX3225SA-25.000M-STD-CRS-2, Temperature="-40°C to +125°C", Temperature Range High=125°C, Temperature Range Low=-40°C, Tolerance=15ppm, Automotive=Yes, Automotive Grade="Grade 1", Category=Crys, Component Type=Standard, Design Item ID=CMP-200220-000002-1, Device Class L1="Passive Components", Device Class L2="Crystals / Oscillators", Device Class L3=Crystals, Digikey Description="CRYSTAL 40MHZ 8PF SMD", Esr=100, Height=0.6mm, Lead Free=Yes, Octopart=https://octopart.com/nx3225sa-25.000m-std-crs-2-ndk-51374293, Pins=4, RoHS=TRUE, Series=NX3225SA, Source="Components - 28.03.25 - 23.15.SchLib"

## Via types
v1: diameter 0.5, hole 0.3, Top Layer 1 to Bottom Layer 1, tented both sides, 6470 vias
v2: diameter 1.27, hole 0.711, Top Layer 1 to Bottom Layer 1, 4 vias

## Nets (pads, with @x,y where several pads share a name; then routed paths per layer and width w, separated by ;. In a path a pad name is that pad's centre, name@x,y a point inside that pad or via, vN(x,y) a via of type N, cw(c..) or ccw(c..) an arc to the next point about the centre after c; other vN are vias at no path point)
3V3_1: C1.2 C2.2 C3.2 C4.1 C5.2 C6.2 C7.2 C21.2 C25.2 C32_I_PhaseA.1 C32_I_PhaseB.1 C32_I_PhaseC.1 C33_I_PhaseA.2 C33_I_PhaseB.2 C33_I_PhaseC.2 C34_I_PhaseA.2 C34_I_PhaseB.2 C34_I_PhaseC.2 C35_I_PhaseA.2 C35_I_PhaseB.2 C35_I_PhaseC.2 C36_I_PhaseA.2 C36_I_PhaseB.2 C36_I_PhaseC.2 C71.2 C72.2 C73.2 D17.C F1.1 FB1.1 FB2.1 P1.1 P2.4 P3.4 P4.4 R5.2 R7.2 R33.2 R50.2 R51.2 R52.2 R53.2 U1.23 U1.35 U1.48 U3.5 U4.5 U5.5 U6.5 U7_I_PhaseA.5 U7_I_PhaseA.6 U7_I_PhaseB.5 U7_I_PhaseB.6 U7_I_PhaseC.5 U7_I_PhaseC.6 U8.5 U13.6 U13.9 U13.11
3V3_2: C75.1 C76.2 C77.2 C78.2 C79.2 C80.2 C81.2 C82.2 C83.2 C85.2 C86.2 C87.2 C89.2 F2.1 L1.2 R36.2 R61.2 R62.2 R67.2 R68.2 R69.2 U15.11 U15.17 U15.31 U15.32
5Vin: C47.2 C48.2 C63.2 D13.C Q4.3 U9.2
  other v2: 121.793,79.375 130.683,86.487 128.524,86.614 135.001,91.313
5Vout: C49.2 C51.2 C57.2 C65_ESP_USB.2 C65_STM_USB.2 F4.1 FB3.1 FB4.1 FB5_ESP_USB.2 FB5_STM_USB.2
Antenna: Ant1.SIG C90.2 L2.1
AS5600-DIR: P1.4 U1.42
AS5600-OUT: P1.5 U1.43
AS5600-PGO: P1.6 U1.26
AS5600-SCL: P1.2 R51.1 R55.2 U1.38 U13.18
AS5600-SDA: P1.3 R52.1 R56.2 U1.47 U13.19 U13.20
BAT_Volt: C42.2 R30.2 U1.18 U8.1 U8.4
BatVoltage: C46.1 D18_PhaseA.A D18_PhaseB.A D18_PhaseC.A F3.2 Q7_PhaseA.4 Q7_PhaseB.4 Q7_PhaseC.4 R28.2 U9.1 U14_PhaseA.1 U14_PhaseB.1 U14_PhaseC.1
C1N: C67.1 U13.5
C1P: C67.2 U13.4
C2N: C66.1 U13.3
C2P: C66.2 U13.2
CHIP_EN: R69.1 R73.2 U15.7 U17.2
D/C: R50.1 R54.2 U13.15
D_ESP_USB_N: J3_ESP_USB.A7 J3_ESP_USB.B7 R44_ESP_USB.1 U12_ESP_USB.4
D_ESP_USB_P: J3_ESP_USB.A6 J3_ESP_USB.B6 R45_ESP_USB.1 U12_ESP_USB.6
D_STM_USB_N: J3_STM_USB.A7 J3_STM_USB.B7 R44_STM_USB.1 U12_STM_USB.4
D_STM_USB_P: J3_STM_USB.A6 J3_STM_USB.B6 R45_STM_USB.1 U12_STM_USB.6
DIR_IN: P2.1 U1.22
DR_ESP_USB_N: R42_ESP_USB.1 R44_ESP_USB.2 R46_ESP_USB.2 U15.25
DR_ESP_USB_P: R43_ESP_USB.1 R45_ESP_USB.2 R47_ESP_USB.2 U15.26
DR_STM_USB_N: R42_STM_USB.1 R44_STM_USB.2 R46_STM_USB.2 U1.33
DR_STM_USB_P: R43_STM_USB.1 R45_STM_USB.2 R47_STM_USB.2 U1.34
ESP-ST_SPI-CLK: U1.13 U15.12
ESP-ST_SPI-CS: U1.12 U15.16
ESP-ST_SPI-MISO: R61.1 U1.14 U15.6
ESP-ST_SPI-MOSI: U1.15 U15.13
ESP_UART0_RX: R2.1 U15.27
ESP_UART0_TX: R3.1 U15.28
GND: Ant1.GND C1.1 C2.1 C3.1 C4.2 C5.1 C6.1 C7.1 C8.2 C9.2 C10.1 C11.1 C12.1 C13.2 C14.1 C15.1 C16.1 C17.1 C18.1 C19.1 C20.1 C21.1 C22.1 C23.1 C24.1 C25.1 C26.1 C27.1 C28.1 C29.1 C30.1 C31.1 C32_I_PhaseA.2 C32_I_PhaseB.2 C32_I_PhaseC.2 C33_I_PhaseA.1 C33_I_PhaseB.1 C33_I_PhaseC.1 C34_I_PhaseA.1 C34_I_PhaseB.1 C34_I_PhaseC.1 C35_I_PhaseA.1 C35_I_PhaseB.1 C35_I_PhaseC.1 C36_I_PhaseA.1 C36_I_PhaseB.1 C36_I_PhaseC.1 C37_I_PhaseA.1 C37_I_PhaseB.1 C37_I_PhaseC.1 C38_I_PhaseA.1 C38_I_PhaseB.1 C38_I_PhaseC.1 C39_I_PhaseA.1 C39_I_PhaseB.1 C39_I_PhaseC.1 C40_I_PhaseA.1 C40_I_PhaseB.1 C40_I_PhaseC.1 C41_I_PhaseA.1 C41_I_PhaseB.1 C41_I_PhaseC.1 C42.1 C43.1 C44.1 C45.1 C46.2 C47.1 C48.1 C49.1 C50.2 C51.1 C52.1 C53.2 C54.1 C55.1 C56.2 C57.1 C58.1 C59.2 C60.1 C61.1 C62.1 C63.1 C64_ESP_USB.1 C64_STM_USB.1 C65_ESP_USB.1 C65_STM_USB.1 C68.1 C69.1 C70.1 C71.1 C72.1 C73.1 C75.2 C76.1 C77.1 C78.1 C79.1 C80.1 C81.1 C82.1 C83.1 C84.1 C85.1 C86.1 C87.1 C88.1 C89.1 C90.1 C91.1 C92.1 C93.1 C94.1 C95.1 C96.1 C97.1 C98.1 C99.1 C100.1 C101.1 C102.1 C103.1 C104.1 C105.1 C106.1 D1.1 D2.1 D3.A D4.A D5.1 D6.A D7.A D8.1 D11.C D12.A D14.A D15.C D16.A D19.1 J1.1 J3_ESP_USB.A1B12 J3_ESP_USB.B1A12 J3_ESP_USB.SH1 J3_ESP_USB.SH2 J3_ESP_USB.SH3 J3_ESP_USB.SH4 J3_STM_USB.A1B12 J3_STM_USB.B1A12 J3_STM_USB.SH1 J3_STM_USB.SH2 J3_STM_USB.SH3 J3_STM_USB.SH4 J4.2 J4.3 P1.7 P2.3 P3.3 P4.3 Q2.1 Q3.4 Q4.1 Q5.1 Q6.3 R6.1 R14.1 R16.1 R17.1 R18.1 R21.1 R22.1 R24.1 R26_I_PhaseA.2 R26_I_PhaseB.2 R26_I_PhaseC.2 R27_I_PhaseA.1 R27_I_PhaseB.1 R27_I_PhaseC.1 R30.1 R31.1 R34.1 R37.1 R39.1 R41_ESP_USB.2 R41_STM_USB.2 R46_ESP_USB.1 R46_STM_USB.1 R47_ESP_USB.1 R47_STM_USB.1 R48_ESP_USB.1 R48_STM_USB.1 R49.1 R54.1 R55.1 R56.1 R73.1 U1.49 U2.1 U3.2 U4.2 U5.2 U6.2 U7_I_PhaseA.3 U7_I_PhaseA.4 U7_I_PhaseA.7 U7_I_PhaseB.3 U7_I_PhaseB.4 U7_I_PhaseB.7 U7_I_PhaseC.3 U7_I_PhaseC.4 U7_I_PhaseC.7 U8.2 U9.3 U10.2 U11.2 U12_ESP_USB.2 U12_STM_USB.2 U13.1 U13.8 U13.10 U13.12 U13.13 U13.16 U13.17 U13.21 U13.22 U13.23 U13.24 U13.25 U13.29 U13.30 U14_PhaseA.4 U14_PhaseB.4 U14_PhaseC.4 U15.33 U16.4 U17.1 U18.1 U19.1 Y1.2 Y1.4 Y4.2 Y4.4